# Allegro board analogater_after_clg_arun.brd
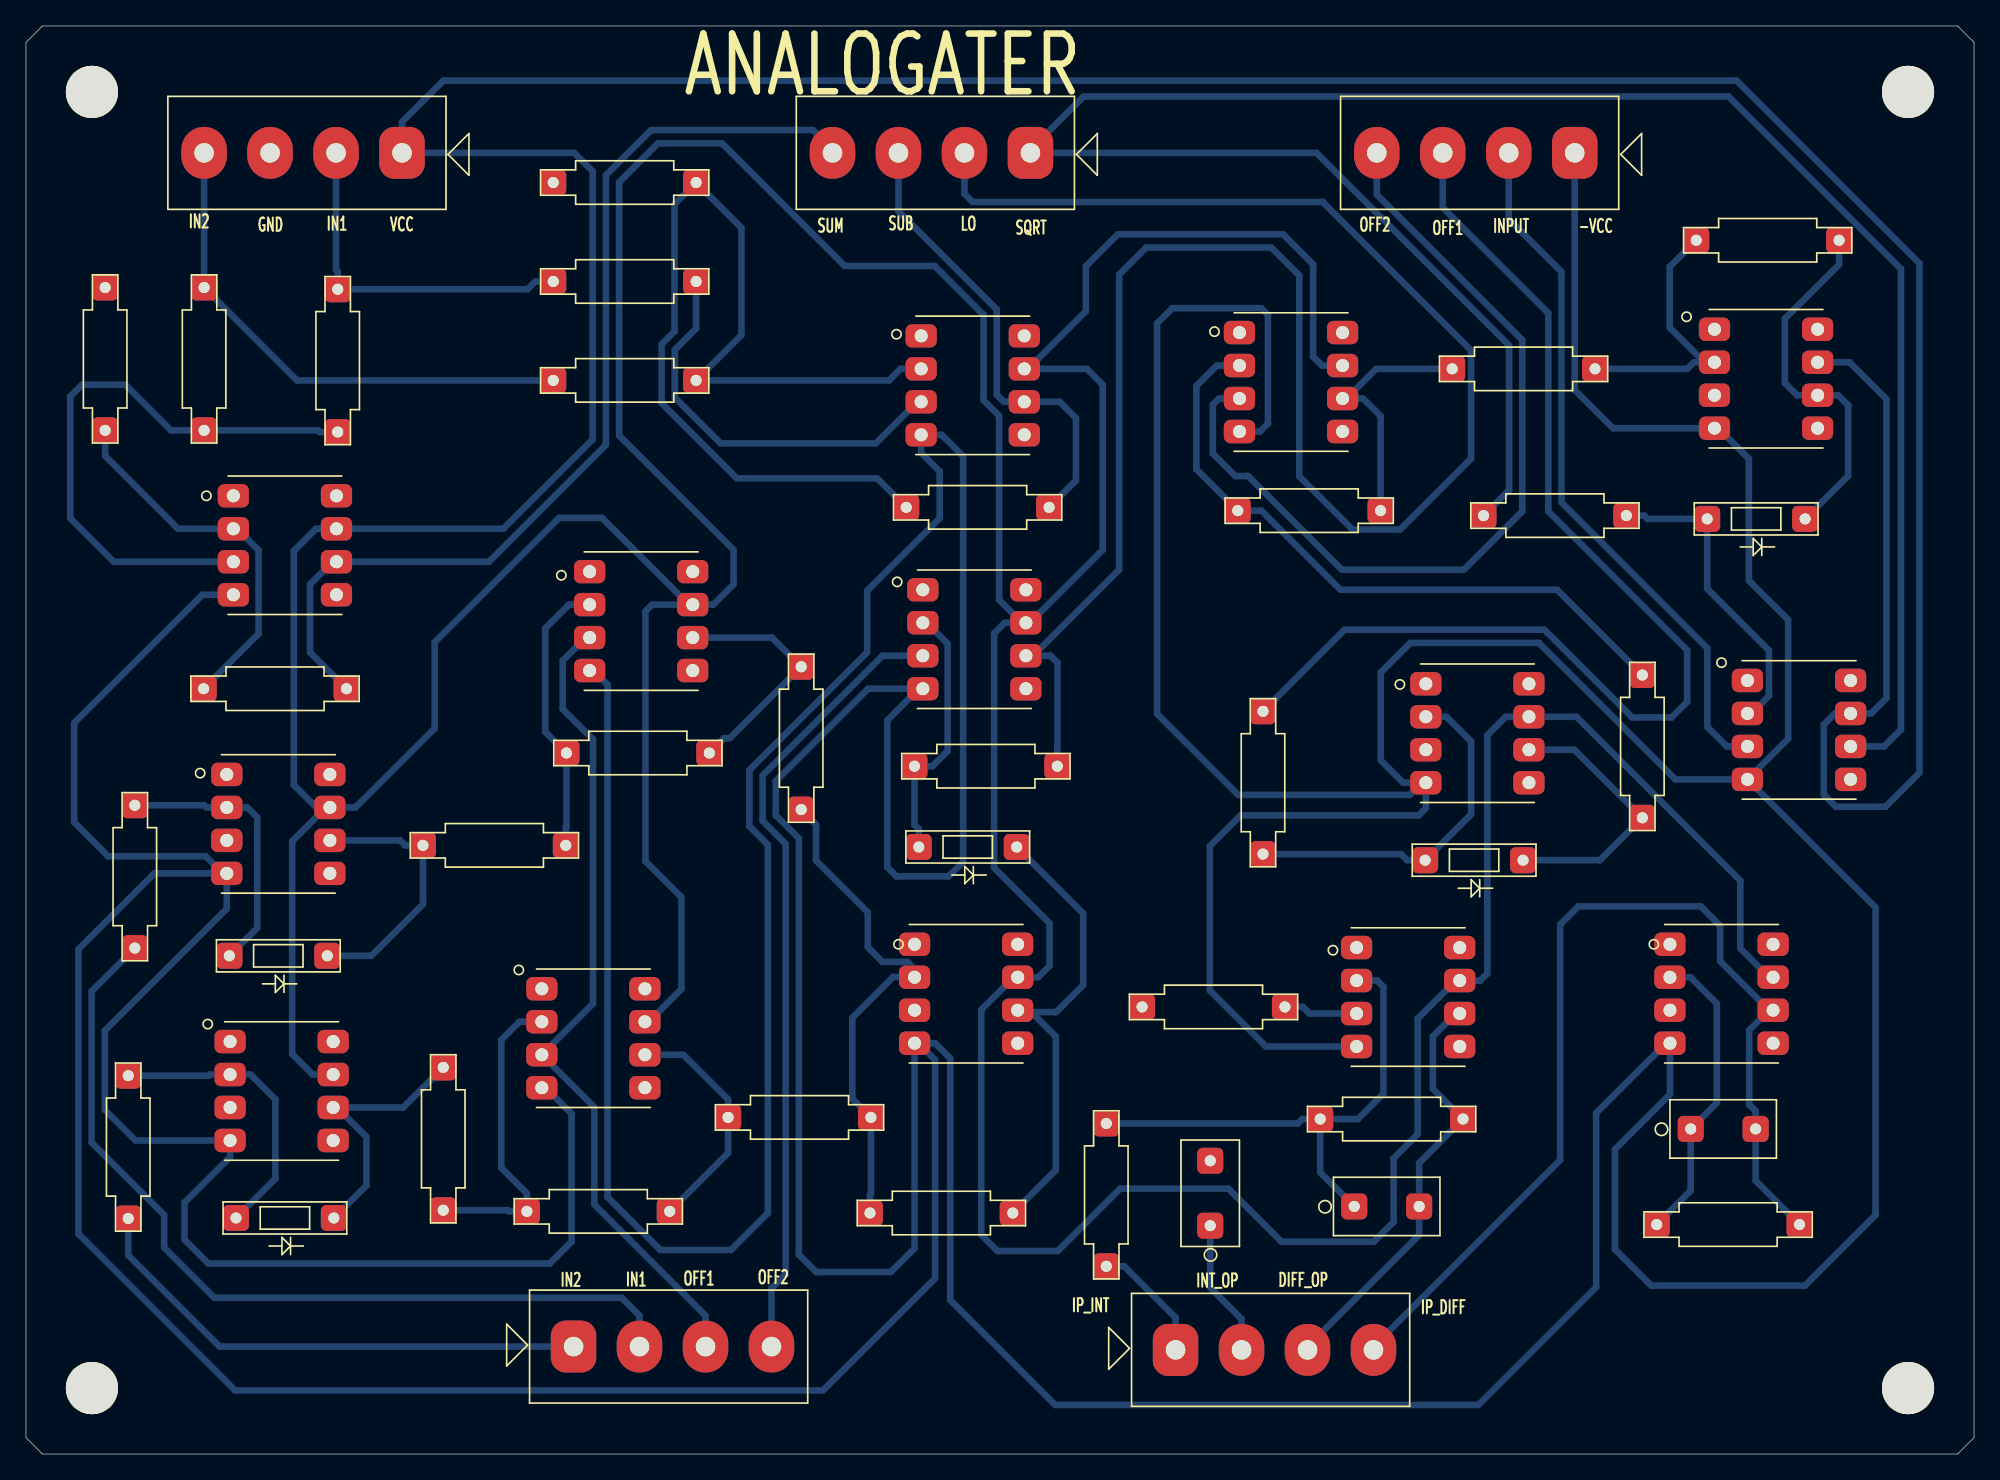
[diagram p0: board, top side]
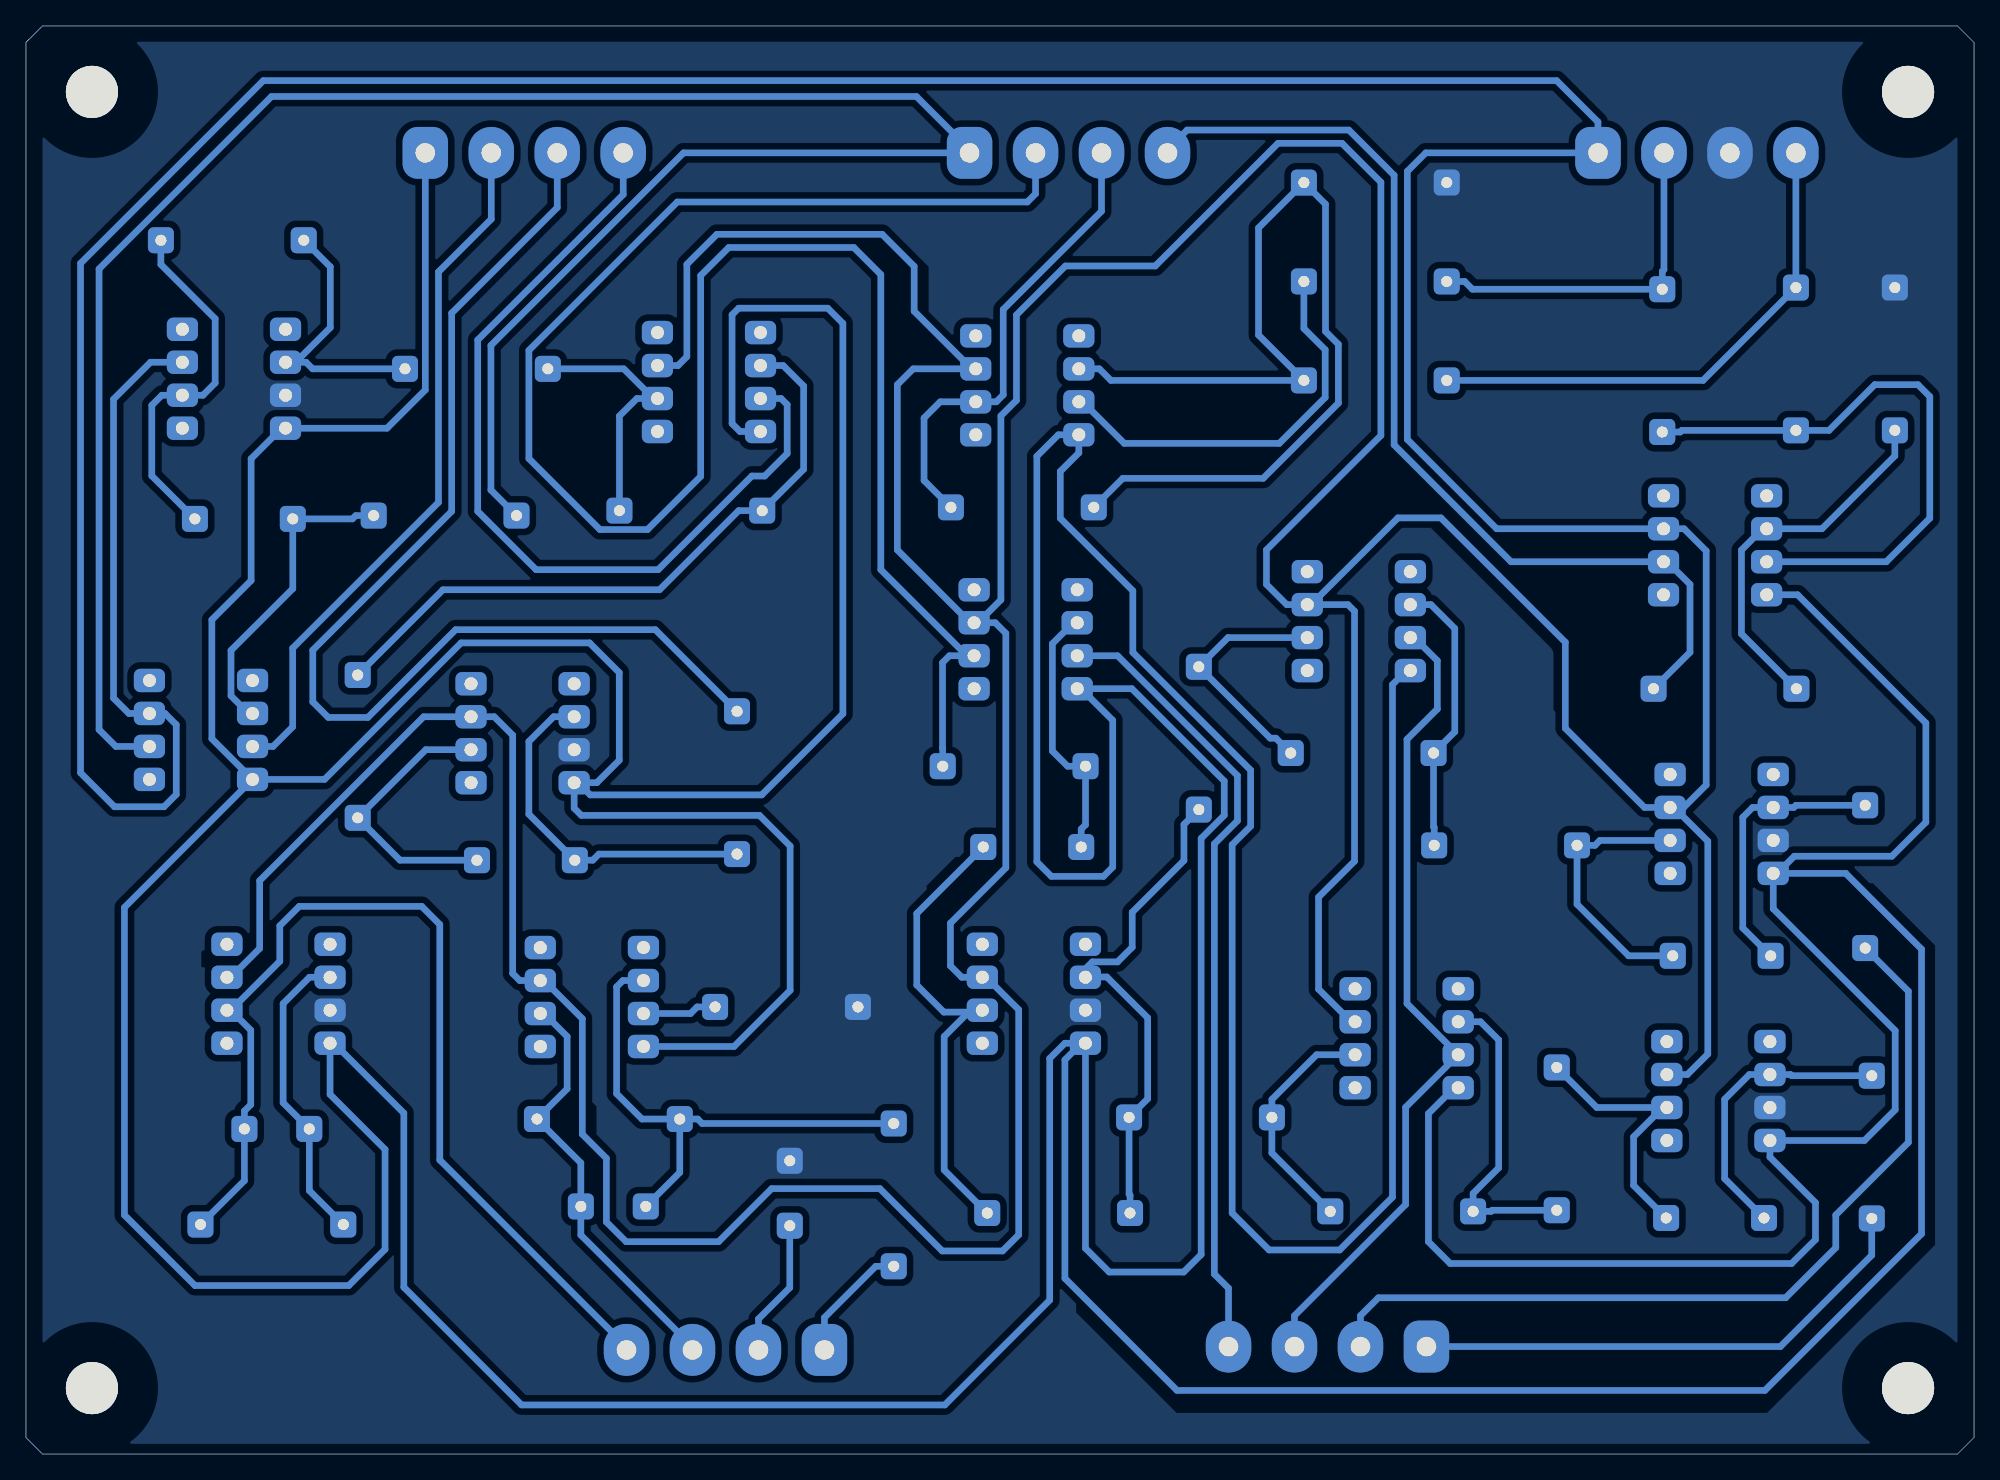
[diagram p1: board, bottom side, seen from below]

Outline 150 x 110 mm; copper layers: TOP, BOTTOM. Coordinates in mm from the lower left corner of the outline.
Outline path: 0,108.73 0,1.27 1.27,0 148.73,0 150,1.27 150,108.73 148.73,110 1.27,110 0,108.73

## Design rules (mm)
constraint set DEFAULT: min track width 0.127

## Placement (name value [footprint] x y rotation side)
C1  CAPACITOR  [CAP_RDER72J474MUB1H03B]  104.78 19.07 0 top
C2  CAPACITOR  [CAP_RDER72J474MUB1H03B]  91.19 20.09 90 top
C3  CAPACITOR  [CAP_RDER72J474MUB1H03B]  130.68 25.04 0 top
D1  1N4148  [DIOAD753W49L380D172B]  111.51 45.74 180 top
D2  1N4148  [DIOAD753W49L380D172B]  133.22 72.03 180 top
D3  1N4148  [DIOAD753W49L380D172B]  19.43 38.38 180 top
D4  1N4148  [DIOAD753W49L380D172B]  72.52 46.76 180 top
D5  1N4148  [DIOAD753W49L380D172B]  19.94 18.18 180 top
J1  CONNECTOR EDGE 5  [TE_282837-4]  21.34 100.22 180 top
J2  CONNECTOR EDGE 5  [TE_282837-4]  111.63 100.22 180 top
J3  CONNECTOR EDGE 5  [TE_282837-4]  96.14 8.02 0 top
J4  CONNECTOR EDGE 5  [TE_282837-4]  69.72 100.22 180 top
J5  CONNECTOR EDGE 5  [TE_282837-4]  49.78 8.28 0 top
NOREF  -  [unnamed]  144.92 5.08 180 top
NOREF#2  -  [unnamed]  144.92 104.92 180 top
NOREF#3  -  [unnamed]  5.08 5.08 0 top
NOREF#4  -  [unnamed]  5.08 104.92 0 top
NOREF#5  -  [#2]  0 103.44 0 top
R1  RESISTOR  [RESAD1100W55L680D260]  19.18 58.95 0 top
R2  RESISTOR  [RESAD1100W55L680D260]  24 84.22 270 top
R3  RESISTOR  [RESAD1100W55L680D260]  13.72 84.35 270 top
R4  RESISTOR  [RESAD1100W55L680D260]  6.1 84.35 270 top
R5  RESISTOR  [RESAD1100W55L680D260]  46.1 82.7 0 top
R6  RESISTOR  [RESAD1100W55L680D260]  46.1 97.94 0 top
R7  RESISTOR  [RESAD1100W55L680D260]  73.28 72.92 0 top
R8  RESISTOR  [RESAD1100W55L680D260]  46.1 90.32 0 top
R9  RESISTOR  [RESAD1100W55L680D260]  95.25 51.71 90 top
R10  RESISTOR  [RESAD1100W55L680D260]  124.46 54.5 90 top
R11  RESISTOR  [RESAD1100W55L680D260]  98.81 72.67 0 top
R12  RESISTOR  [RESAD1100W55L680D260]  134.11 93.49 0 top
R13  RESISTOR  [RESAD1100W55L680D260]  117.73 72.28 180 top
R14  RESISTOR  [RESAD1100W55L680D260]  115.32 83.59 0 top
R15  RESISTOR  [RESAD1100W55L680D260]  105.16 25.8 0 top
R16  RESISTOR  [RESAD1100W55L680D260]  83.19 19.96 90 top
R17  RESISTOR  [RESAD1100W55L680D260]  91.44 34.44 0 top
R18  RESISTOR  [RESAD1100W55L680D260]  131.06 17.67 0 top
R20  RESISTOR  [RESAD1100W55L680D260]  73.91 52.98 0 top
R21  RESISTOR  [RESAD1100W55L680D260]  47.12 54 0 top
R23  RESISTOR  [RESAD1100W55L680D260]  8.38 44.47 270 top
R24  RESISTOR  [RESAD1100W55L680D260]  36.07 46.88 0 top
R25  RESISTOR  [RESAD1100W55L680D260]  59.69 55.14 270 top
R27  RESISTOR  [RESAD1100W55L680D260]  44.07 18.69 0 top
R29  RESISTOR  [RESAD1100W55L680D260]  7.87 23.64 270 top
R30  RESISTOR  [RESAD1100W55L680D260]  32.13 24.28 270 top
R31  RESISTOR  [RESAD1100W55L680D260]  59.56 25.93 0 top
R32  RESISTOR  [RESAD1100W55L680D260]  70.48 18.56 0 top
U1  UA748  [DIP794W45P254L959H508Q8]  19.94 70 0 top
U2  UA748  [DIP794W45P254L959H508Q8]  72.9 82.32 0 top
U3  UA748  [DIP794W45P254L959H508Q8]  111.76 55.52 0 top
U4  UA748  [DIP794W45P254L959H508Q8]  97.41 82.57 0 top
U5  UA748  [DIP794W45P254L959H508Q8]  133.99 82.83 0 top
U6  UA748  [DIP794W45P254L959H508Q8]  136.53 55.77 0 top
U7  UA748  [DIP794W45P254L959H508Q8]  106.43 35.2 0 top
U8  UA748  [DIP794W45P254L959H508Q8]  130.56 35.45 0 top
U9  UA748  [DIP794W45P254L959H508Q8]  19.43 48.54 0 top
U10  UA748  [DIP794W45P254L959H508Q8]  47.37 64.16 0 top
U11  UA748  [DIP794W45P254L959H508Q8]  19.68 27.96 0 top
U12  UA748  [DIP794W45P254L959H508Q8]  43.69 32.03 0 top
U13  UA748  [DIP794W45P254L959H508Q8]  72.39 35.45 0 top
U14  UA748  [DIP794W45P254L959H508Q8]  73.03 62.76 0 top

## Library data of the parts
C1-C3 = CAPACITOR
D1-D5 = 1N4148
J1-J5 = CONNECTOR EDGE 5_0
R1-R18 R20 R21 R23-R25 R27 R29-R32 = RESISTOR_0
U1-U14 = UA748

## Footprints (pads in the part's own frame, mm; a bottom-side part is the same pattern mirrored in y, then rotated)
CAP_RDER72J474MUB1H03B
  rrect 2x2 hole 0.85: 1(-2.499,0) 2(2.499,0)
DIOAD753W49L380D172B
  rrect 2x2 hole 0.85: A(3.769,0) K(-3.769,0)
DIP794W45P254L959H508Q8
  rrect 2.4x1.8 hole 1: 1(-3.97,3.81) 2(-3.97,1.27) 3(-3.97,-1.27) 4(-3.97,-3.81) 5(3.97,-3.81) 6(3.97,-1.27) 7(3.97,1.27) 8(3.97,3.81)
RESAD1100W55L680D260
  rrect 2x2 hole 0.85: 1(-5.499,0) 2(5.499,0)
TE_282837-4
  rrect 3.5x4 hole 1.5: 1(-7.62,0)
  oval 3.5x4 hole 1.5: 2(-2.54,0) 3(2.54,0) 4(7.62,0)
unnamed
  round 4.013 hole 4.013 unplated: (0,0)

## Nets
-VCC: J2.1 U1.4(VCC-) U2.4(VCC-) U3.4(VCC-) U4.4(VCC-) U5.4(VCC-) U6.4(VCC-) U7.4(VCC-) U8.4(VCC-) U9.4(VCC-) U10.4(VCC-) U11.4(VCC-) U12.4(VCC-) U13.4(VCC-) U14.4(VCC-)
GND: C2.2 J1.3 R4.1 R6.1 R17.1 U3.3 U5.3 U8.3 U9.3 U11.3 U13.3
VCC: J1.1 U1.7 U2.7 U3.7 U4.7 U5.7 U6.7 U7.7 U8.7 U9.7 U10.7 U11.7 U12.7 U13.7 U14.7
$D_LO: J4.2 R20.2 U14.6
N00299: J4.4 R1.2 U1.6
N00311: R1.1 R4.2 U1.2
N00349: R2.2 R3.2 U1.3
N01068: J1.4 R3.1 R5.1
N01354: R5.2 R6.2 R7.1 U2.2
N01376: J4.3 R7.2 U2.6
N01495: R8.2 U2.3
N01502: J1.2 R2.1 R8.1
N02285: D1.K R10.1 U3.6
N02293: D1.A R9.1 U3.2
N02329: J2.3 R9.2
N02815: J4.1 R13.2 U6.6
N02823: D2.A R13.1 U6.2
N02848: D2.K R12.2 U5.6
N02856: R12.1 R14.2 U5.2
N02901: R11.2 R14.1 U4.6
N02908: R10.2 R11.1 U4.2
N05461: J2.4 U4.3
N05687: J2.2 U6.3
N13318: C1.2 J3.3 R15.2 U7.6
N13330: C1.1 R15.1 R16.2 U7.2
N13536: R17.2 U7.3
N13581: C3.1 R18.1 U8.2
N13619: C2.1 J3.2
N13623: C3.2 J3.4 R18.2 U8.6
N14626: J3.1 R16.1
N29081: J5.4 U14.3
N29109: J5.3 U10.3 U12.3
N29207: D3.A R23.1 U9.2
N29215: D3.K R24.1 U9.6
N29247: D4.A R20.1 U14.2
N29263: R21.1 R24.2 U10.2
N29271: R21.2 R25.1 U10.6
N29493: D4.K R32.2 U13.6
N31471: D5.A R29.1 U11.2
N31479: D5.K R30.1 U11.6
N31527: R27.1 R30.2 U12.2
N31535: R27.2 R31.1 U12.6
N32612: R25.2 R31.2 R32.1 U13.2
N33045: J5.2 R23.2
N33052: J5.1 R29.2

Pads without a net: U1 1 5 8; U2 1 5 8; U3 1 5 8; U4 1 5 8; U5 1 5 8; U6 1 5 8; U7 1 5 8; U8 1 5 8; U9 1 5 8; U10 1 5 8; U11 1 5 8; U12 1 5 8; U13 1 5 8; U14 1 5 8

## Routing (per net, layer and track width the routed paths; a pad name or vN(x,y) marks a point on that pad's centre or on a via; arc(x,y) is an arc through that point)
-VCC: length 911.7
  BOTTOM w0.508: 68.72,31.64 70,30.36 70,13.53 61.37,4.9 16.1,4.9 4.04,16.96 4.04,38.89 9.88,44.73 15.16,44.73 ; 68.72,31.64 U13.4 68.42,15.85 66.59,14.02 60.86,14.02 59.51,15.36 59.51,47.42 57.73,49.2 57.73,51.84 64.85,58.95 68.76,58.95 ; 68.72,31.64 70,31.64 71.17,30.48 71.17,11.86 79.25,3.78 111.84,3.78 120.9,12.85 120.9,26.26 126.29,31.64 U8.4 126.59,27.7 122.35,23.47 122.35,15.77 125.15,12.98 136.98,12.98 142.42,18.41 142.42,42.1 U6.4 ; U12.4 40.02,28.22 42.01,26.22 42.01,16.35 40.34,14.68 14.05,14.68 12.21,16.52 12.21,19.36 15.71,22.87 U11.4 8.43,24.15 6.07,26.51 6.07,32.61 15.46,42 U9.4 15.16,44.73 ; U6.4 127.01,51.96 116.5,62.48 106.6,62.48 104.32,60.19 104.32,53.44 106.05,51.71 107.49,51.71 ; U6.4 135.69,55.1 135.69,64.26 132.66,67.28 132.66,76.67 130.31,79.02 U5.4 122.2,79.02 119.25,81.96 J2.1 ; 68.76,58.95 66.32,56.51 66.32,45.21 67.03,44.5 71.04,44.5 72.16,45.61 72.16,76.86 70.51,78.51 U2.4 68.93,77.12 70.36,75.69 70.36,72.08 64.77,66.49 64.77,61.75 55.7,52.68 55.7,48.36 57.12,46.93 57.12,18.56 54.28,15.72 48.84,15.72 44.78,19.78 44.78,59.27 43.7,60.35 U10.4 ; 68.76,58.95 U14.4 ; U1.4 13.59,66.19 3.71,56.31 3.71,48.66 6.32,46.05 13.84,46.05 15.16,44.73 ; U7.4 95.48,31.39 91.16,35.71 91.16,46.83 93.52,49.2 107.24,49.2 107.79,49.75 U3.4 107.49,51.71 ; 107.49,51.71 106.55,50.77 93.34,50.77 87.1,57.02 87.1,87.09 88.27,88.26 95.12,88.26 95.63,87.75 95.63,79.37 95.02,78.76 U4.4
VCC: length 735.2
  BOTTOM w0.508: 76.7,64.03 75.36,64.03 74.55,63.22 74.55,45.16 78.82,40.89 78.82,37.6 77.94,36.72 U13.7 76.06,36.72 73.56,34.22 73.56,16.89 74.8,15.64 79.45,15.64 84.25,20.44 92.58,20.44 96.67,16.35 103.78,16.35 105.31,17.88 105.31,22.78 107.16,24.63 107.16,33.54 110.1,36.47 U7.7 111.98,36.47 112.52,37.02 112.52,55.37 113.94,56.79 U3.7 119.38,56.79 132,44.17 132,38.95 134.23,36.72 U8.7 ; 76.7,64.03 74.93,65.79 74.93,79.97 73.74,81.16 73.74,87.74 69.96,91.51 63.04,91.51 53.59,100.96 48.67,100.96 45.67,97.96 45.67,78.46 54.48,69.64 54.48,66.99 52.92,65.43 U10.7 51.04,65.43 ; 76.7,64.03 U14.7 77.29,64.03 82.91,69.64 82.91,82.37 81.69,83.59 77.17,83.59 ; 23.1,49.81 22.35,49.81 20.62,51.53 20.62,69.57 22.33,71.27 U1.7 36.75,71.27 43.64,78.15 43.64,98.8 42.21,100.22 J1.1 28.96,102.61 32.14,105.79 131.72,105.79 145.8,91.72 145.8,52.47 143.18,49.86 139.37,49.86 138.43,50.8 138.43,56.18 139.29,57.04 U6.7 142.08,57.04 143.26,58.22 143.26,81.25 140.41,84.1 U5.7 ; 23.1,49.81 20.5,47.2 20.5,30.81 22.07,29.23 U11.7 ; 23.1,49.81 U9.7 25.37,49.81 31.47,55.9 31.47,62.53 41.05,72.11 44.36,72.11 51.04,65.43 ; 51.04,65.43 48.21,65.43 47.7,64.92 47.7,45.67 50.47,42.9 50.47,35.81 47.96,33.3 U12.7 ; 77.17,83.59 U2.7 ; 77.17,83.59 81.61,88.03 81.61,91.49 84.07,93.95 96.8,93.95 99.11,91.64 99.11,84.53 99.8,83.84 U4.7
$D_LO: length 146.5
  BOTTOM w0.508: 77.55,61.49 78.89,61.49 79.43,60.96 79.43,54.37 79.41,54.36 R20.2 ; 77.55,61.49 U14.6 ; 77.55,61.49 84.18,68.12 84.18,90.85 86.26,92.94 95.89,92.94 98.04,90.78 98.04,75.31 102.14,71.21 105.81,71.21 111.27,76.68 111.27,85.01 99.85,96.44 72.9,96.44 72.26,97.08 J4.2
N00299: length 77
  BOTTOM w0.508: J4.4 62.1,100.47 60.6,101.98 48.14,101.98 44.65,98.5 44.65,77.73 35.65,68.73 U1.6 23.61,68.73 21.87,66.99 21.87,61.76 R1.2
N00311: length 29.2
  BOTTOM w0.508: R4.2 6.1,76.88 11.71,71.27 U1.2 16.27,71.27 17.91,69.63 17.91,63.18 R1.1
N00349: length 45.8
  BOTTOM w0.508: R2.2 22.62,78.72 22.5,78.85 R3.2 11.16,78.85 7.65,82.37 4.32,82.37 3.4,81.45 3.4,72.08 6.76,68.73 U1.3
N01068: length 40.2
  BOTTOM w0.508: R5.1 20.87,82.7 R3.1 J1.4
N01354: length 76.1
  BOTTOM w0.508: R7.1 65.54,75.16 54.74,75.16 48.95,80.95 48.95,85.48 49.94,86.47 49.94,96.28 R6.2 55.09,94.45 55.09,86.19 R5.2 66.46,82.7 67.35,83.59 U2.2
N01376: length 36.4
  BOTTOM w0.508: J4.3 67.18,95.73 74.75,88.16 74.75,81.58 75.29,81.05 U2.6 79.6,81.05 80.85,79.8 80.85,74.99 R7.2
N01495: length 31.4
  BOTTOM w0.508: R8.2 51.6,86.7 49.96,85.06 49.96,81.38 53.49,77.85 65.43,77.85 68.63,81.05 U2.3
N01502: length 27.4
  BOTTOM w0.508: J1.2 23.88,91.23 24,91.1 R2.1 38.62,89.72 39.22,90.32 R8.1
N02285: length 21.4
  BOTTOM w0.508: D1.K 121.2,45.74 R10.1 119.21,54.25 U3.6
N02293: length 27.6
  BOTTOM w0.508: R9.1 105.89,46.21 106.36,45.74 D1.A 111.28,49.28 111.28,54.88 109.37,56.79 U3.2
N02329: length 88.6
  BOTTOM w0.508: J2.3 109.09,96.01 117.22,87.88 117.22,72.62 127.91,61.92 127.91,57.93 126.72,56.74 123.67,56.74 116.92,63.5 101.54,63.5 R9.2
N02815: length 171.3
  BOTTOM w0.508: R13.2 114.2,74.25 114.2,85.39 99.37,100.22 J4.1 77.34,100.47 81.44,104.57 131.09,104.57 144.37,91.28 144.37,55.8 143.08,54.5 U6.6
N02823: length 24.2
  BOTTOM w0.508: U6.2 132.85,57.04 134.21,58.4 134.21,61.9 129.45,66.66 D2.A 124.86,72.03 124.61,72.28 R13.1
N02848: length 28.4
  BOTTOM w0.508: R12.2 139.61,91.63 135.43,87.45 135.43,82.5 136.37,81.56 U5.6 139.54,81.56 140.31,80.78 140.31,75.35 D2.K
N02856: length 20.8
  BOTTOM w0.508: R12.1 126.57,91.45 126.57,86.76 129.24,84.1 ; 129.24,84.1 U5.2 ; 129.24,84.1 128.43,84.1 127.93,83.59 R14.2
N02901: length 19.9
  BOTTOM w0.508: 101.68,81.3 103.96,83.59 R14.1 ; 101.68,81.3 U4.6 ; 101.68,81.3 102.96,81.3 104.31,79.96 R11.2
N02908: length 51.3
  BOTTOM w0.508: R10.2 117.89,66.57 101.22,66.57 95.12,72.67 R11.1 90.12,75.85 90.12,82.27 91.69,83.84 U4.2
N05461: length 67.7
  BOTTOM w0.508: J2.4 104.01,97.01 115.21,85.81 115.21,72.62 110.72,68.12 101.32,68.12 94.11,75.33 93.12,75.33 91.39,77.06 91.39,80.83 91.86,81.3 U4.3
N05687: length 54.3
  BOTTOM w0.508: U6.3 130.97,54.5 129.46,56.01 129.46,62.07 118.24,73.3 118.24,91.06 114.17,95.12 J2.2
N13318: length 32.9
  BOTTOM w0.508: U7.6 110.1,33.93 108.33,32.17 108.33,28.13 R15.2 107.27,22.42 C1.2 107.27,16.87 98.68,8.27 J3.3
N13330: length 40.6
  BOTTOM w0.508: R15.1 98.28,25.8 97.93,25.46 R16.2 ; R15.1 102.57,25.8 104.52,27.76 104.52,35.99 104.04,36.47 U7.2 ; R15.1 99.66,21.69 C1.1
N13536: length 5.7
  BOTTOM w0.508: U7.3 98.83,33.93 98.32,34.44 R17.2
N13581: length 23.4
  BOTTOM w0.508: U8.2 128.17,36.72 130.2,34.69 130.2,27.06 C3.1 128.18,20.29 R18.1
N13619: length 10.6
  BOTTOM w0.508: 93.6,8.02 93.6,10.4 91.19,12.82 C2.1
N13623: length 79.4
  BOTTOM w0.508: 134.23,34.18 132.69,32.65 132.69,26.91 133.18,26.42 C3.2 133.18,21.06 R18.2 ; 134.23,34.18 130.45,37.96 130.45,40.69 128.96,42.19 119.53,42.19 118.14,40.79 118.14,22.65 103.76,8.27 J3.4 ; 134.23,34.18 U8.6
N14626: length 9.5
  BOTTOM w0.508: R16.1 84.57,14.46 88.52,10.51 88.52,8.02
N29081: length 61.3
  BOTTOM w0.508: J5.4 57.4,12.77 58.5,13.86 58.5,47 56.72,48.78 56.72,52.26 65.95,61.49 U14.3
N29109: length 63.5
  BOTTOM w0.508: U10.3 43.1,62.89 41.33,61.11 41.33,57.39 43.66,55.05 43.66,34.7 U12.3 43.76,26.71 43.76,19.22 52.32,10.66 J5.3
N29207: length 21.4
  BOTTOM w0.508: R23.1 13.71,49.97 13.88,49.81 U9.2 17.04,49.81 17.81,49.04 17.81,40.52 D3.A
N29215: length 20.9
  BOTTOM w0.508: D3.K 26.59,38.38 30.57,42.35 R24.1 29.19,46.88 28.81,47.27 U9.6
N29247: length 20.2
  BOTTOM w0.508: D4.A 68.75,48.14 68.41,48.47 R20.1 69.8,52.98 70.97,54.15 70.97,62.42 69.35,64.03 U14.2
N29263: length 21.6
  BOTTOM w0.508: U10.2 41.82,65.43 39.98,63.59 39.98,55.64 R21.1 41.62,48.32 41.57,48.27 R24.2
N29271: length 19.1
  BOTTOM w0.508: R21.2 53.76,55.14 54.19,55.14 R25.1 57.44,62.89 U10.6
N29493: length 36.4
  BOTTOM w0.508: 77.41,34.04 76.5,34.04 U13.6 ; 77.41,34.04 79.3,32.15 79.3,21.88 R32.2 ; 77.41,34.04 79.32,34.04 81.41,36.12 81.41,41.64 D4.K
N31471: length 22.6
  BOTTOM w0.508: R29.1 14.04,29.14 14.13,29.23 U11.2 17.3,29.23 19.2,27.33 19.2,21.22 D5.A
N31479: length 20.2
  BOTTOM w0.508: R30.1 29.04,26.69 23.95,26.69 ; 23.95,26.69 26.21,24.43 26.21,20.69 D5.K ; 23.95,26.69 U11.6
N31527: length 24.2
  BOTTOM w0.508: U12.2 38,33.3 36.6,31.9 36.6,22.04 38.57,20.07 R27.1 37.19,18.69 37.1,18.78 R30.2
N31535: length 18.3
  BOTTOM w0.508: R27.2 54.06,23.19 R31.1 54.06,27.31 50.62,30.76 U12.6
N32612: length 39.4
  BOTTOM w0.508: 68.4,36.75 U13.2 ; 68.4,36.75 66.77,36.75 63.63,33.6 63.63,27.36 R31.2 65.06,20.02 64.99,19.94 R32.1 ; 68.4,36.75 68.4,37.4 67.89,37.91 65.95,37.91 64.82,39.04 64.82,41.73 60.84,45.71 60.84,48.5 R25.2
N33045: length 67.9
  BOTTOM w0.508: J5.2 47.24,10.66 45.87,12.04 14.5,12.04 10.64,15.9 10.64,18.41 5.05,24 5.05,35.65 R23.2
N33052: length 40
  BOTTOM w0.508: J5.1 14.91,8.28 7.87,15.31 R29.2

## Copper pours and planes (outline as drawn; the poured copper is in the pictures)
GND on BOTTOM: 1.27,108.78 148.73,108.78 148.73,0.78 1.27,0.78 ; 40 cut-outs

## Text on the board
BOTTOM: BOTTOM_LAYER
TOP: TOP
Ref Des/Silkscreen Top: IN2 | GND | IN1 | VCC | OFF1 | OFF2 | SUM | SUB | LO | SQRT | IP_INT | INT_OP | DIFF_OP | IP_DIFF | INPUT | -VCC | ANALOGATER
XSECTION_CHART: *  SURFACE | L1 TOP CONDUCTOR | *  DIELECTRIC | L2 BOTTOM CONDUCTOR | DESIGN CROSS SECTION CHART | ___________________________ | TOTAL THICKNESS 63 MIL | 1-2
DIMENSION: FIGURE | FINISHED_SIZE | 30.0 | 32.0 | 34.0 | 44.0 | 158.0 | DRILL CHART: TOP to BOTTOM | ALL UNITS ARE IN MILS | TOLERANCE_DRILL | +3.0/-3.0 | +2.0/-2.0 | PLATED | NON-PLATED | QTY | 62 | 10 | 112 | 20 | 4 | 208 | TOTAL HOLES: | ALL DIMENSIONS ARE IN MM
